# Altium PCB MICROCONTROLLER.PcbDoc
Units mm, origin at the board's own origin, x right, y up, seen from the top; angles counter-clockwise.
Board outline 58 x 58 mm, 2 copper layers (Top Layer, Bottom Layer); 5 components, 27 nets, 52 pads, 0 vias.
Unrouted connection lines stored in the file: 1.
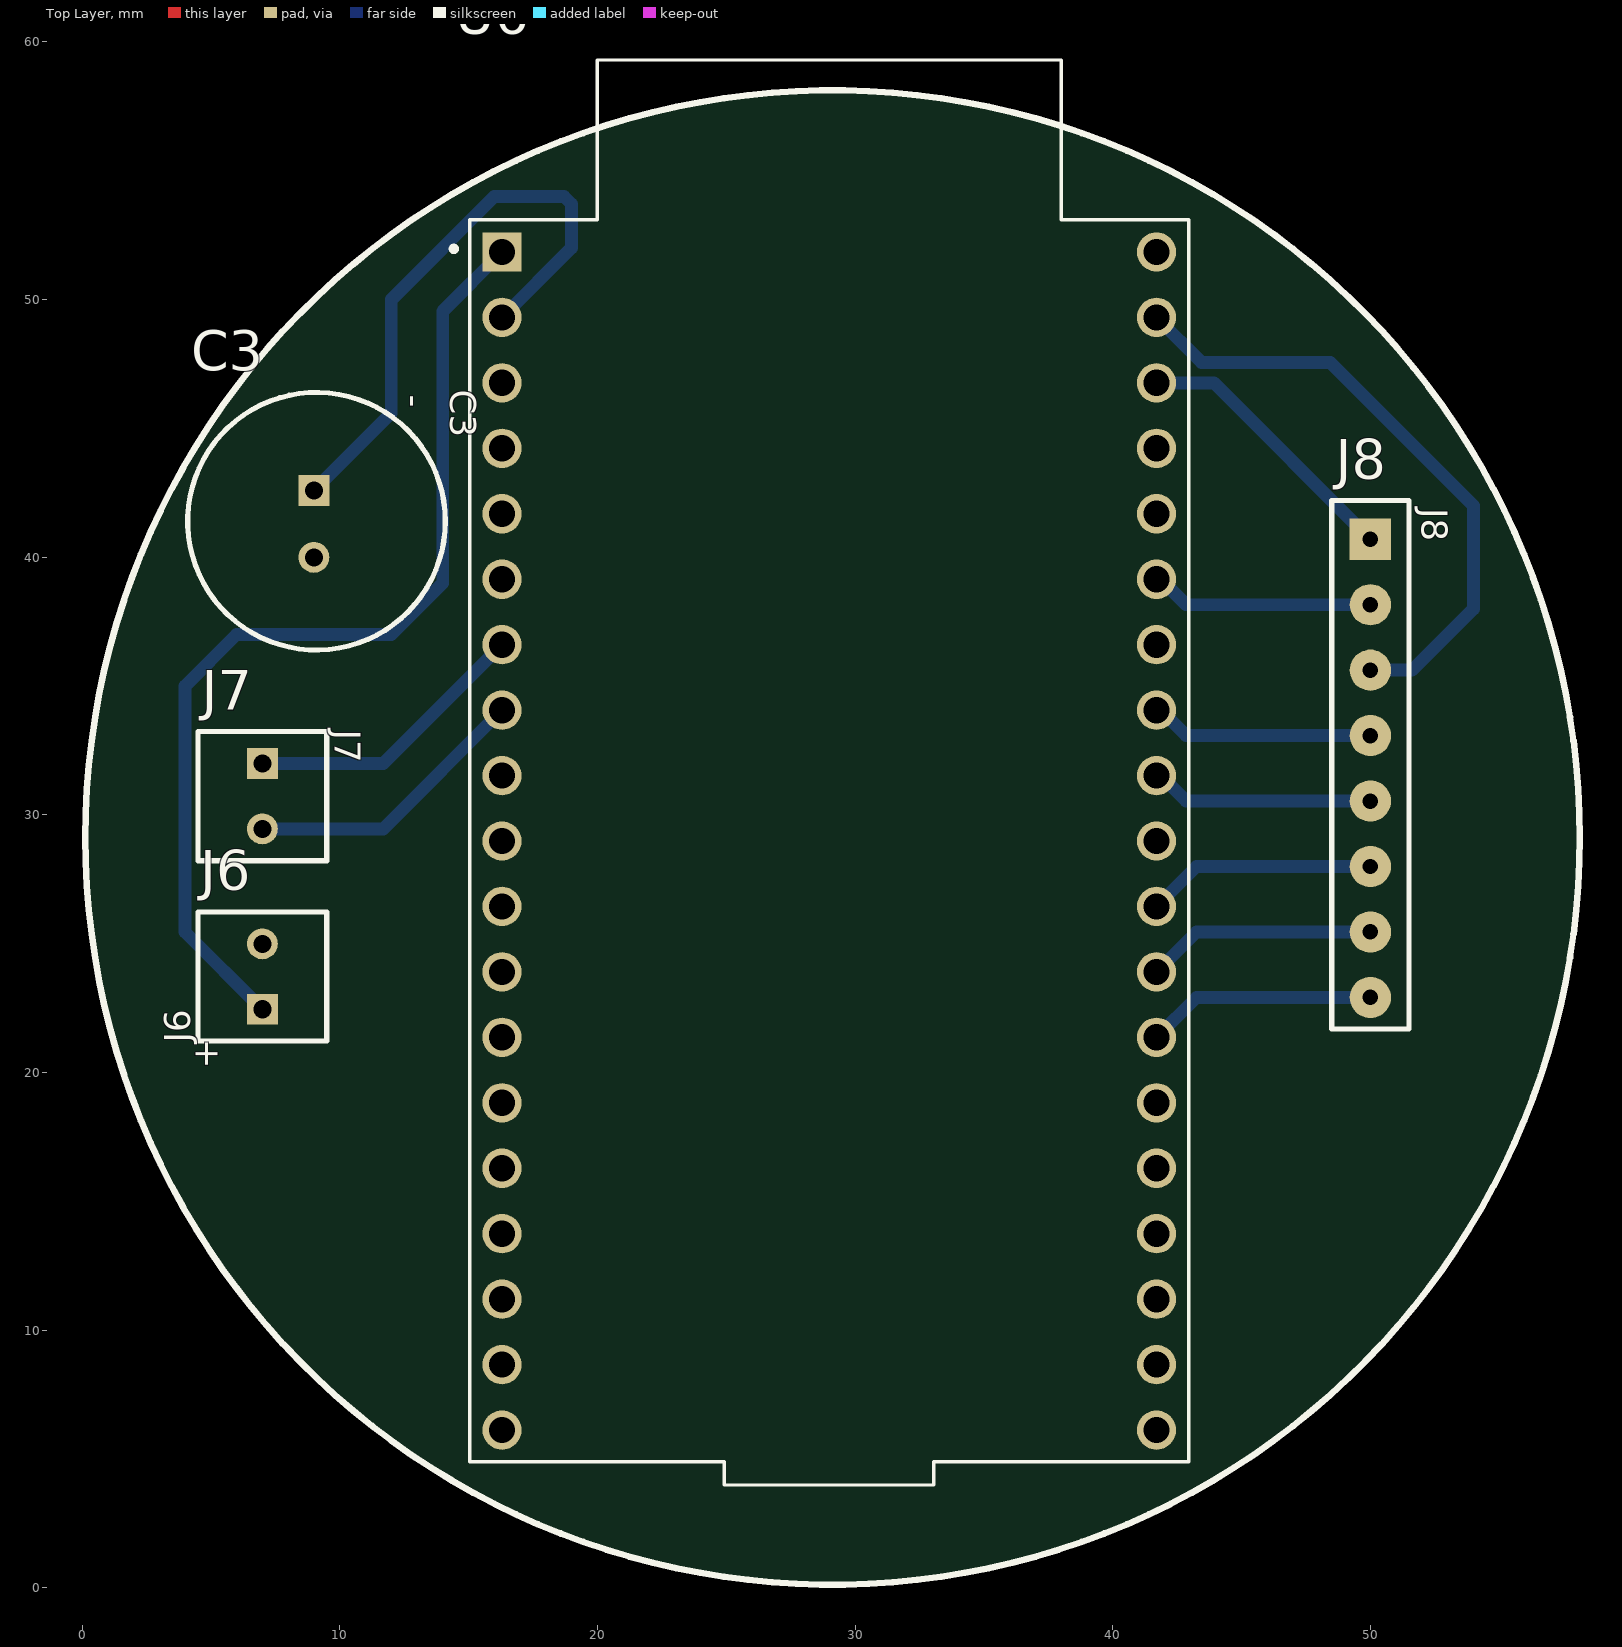
[diagram p0: Top Layer view]
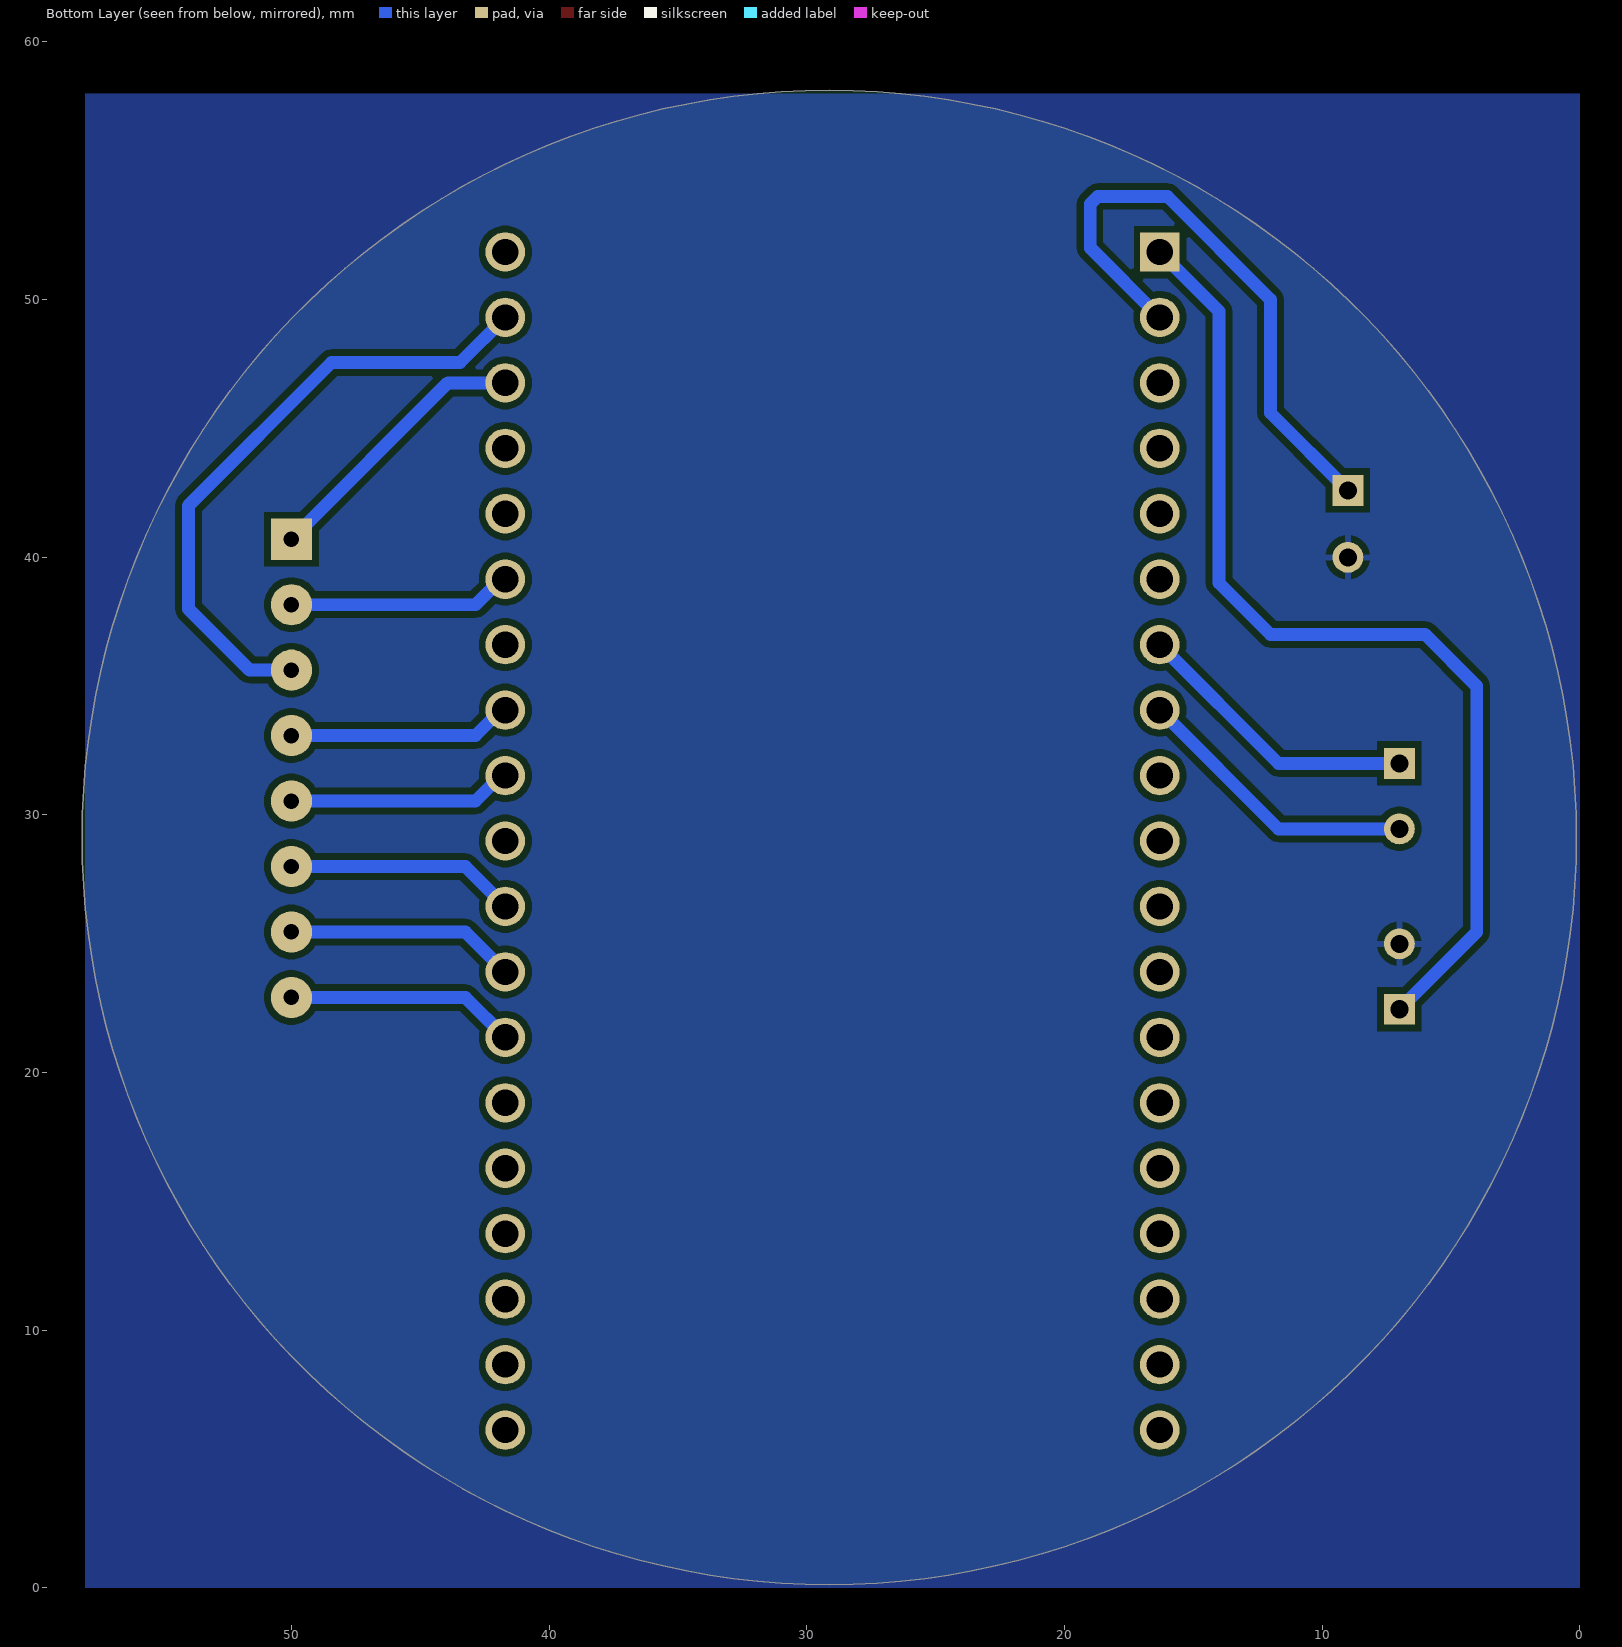
[diagram p1: Bottom Layer view, seen from below]
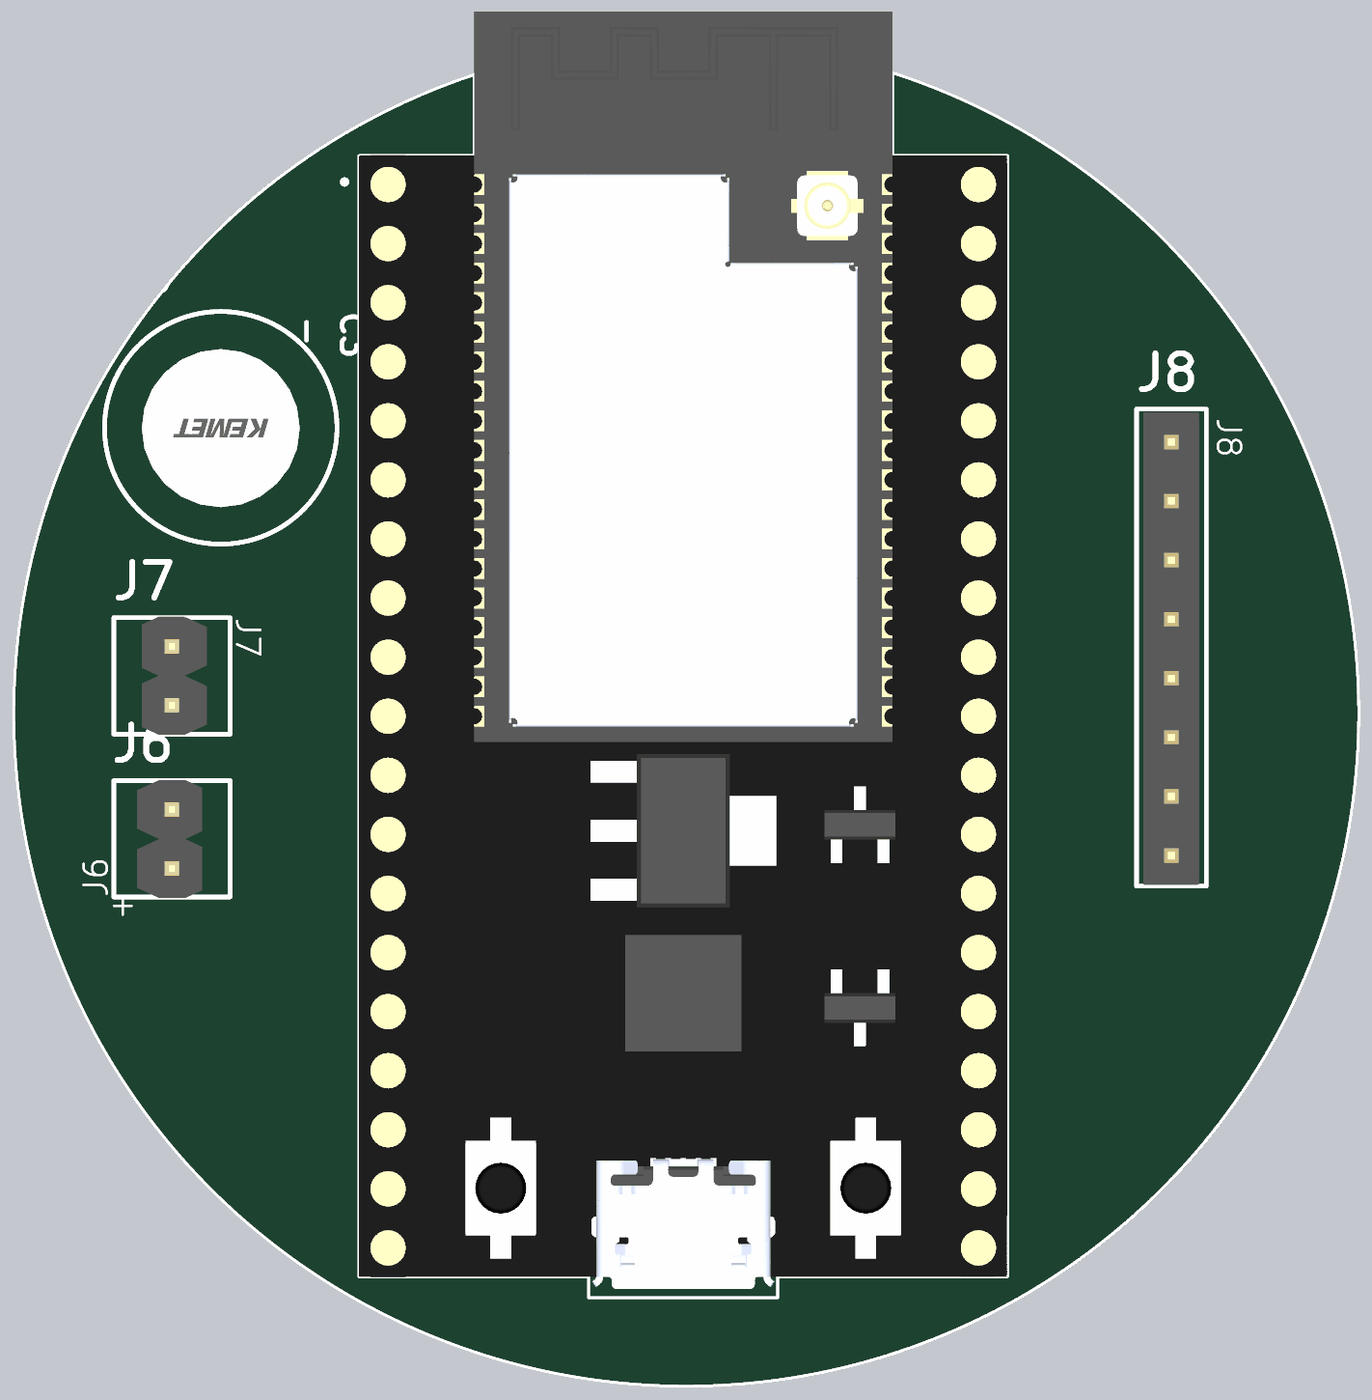
[diagram p2: 3D render of the assembled board from above, using the file's embedded part models]

## Layer stack, top to bottom
Top Solder: solder mask 0.0102, Solder Resist, Dk 3.5
Top Layer: signal copper 0.0356
Dielectric 1: dielectric 0.32, FR-4, Dk 4.8
Bottom Layer: signal copper 0.0356
Bottom Solder: solder mask 0.0102, Solder Resist, Dk 3.5

## Board outline
29.127,0.127 cw(c29.127,29.127) 0.127,29.127 cw(c29.127,29.127) 29.127,58.127 cw(c29.127,29.127) 58.127,29.127 cw(c29.127,29.127)

## Design rules (kind name [scope] priority, off if disabled: settings)
Clearance [All] p1: gap=0.254 ignorepadtopadclearanceinfootprint=FALSE except(0: Arc-Hole Track-Hole SMDPad-Hole THPad-Hole Via-Hole Fill-Hole Poly-Hole Region-Hole Text-Hole)
PolygonConnect [All] p1: connectstyle=Relief reliefconductorwidth=0.254 reliefentries=4 polygonreliefangle="90 Angle" airgapwidth=0.254
RoutingVias [All] p1: holewidth=0.711 width=1.27 viastyle="Through Hole" minholewidth=0.711 minwidth=1.27 maxholewidth=0.711 maxwidth=1.27
SolderMaskExpansion [All] p1: expansion=0.102 istentingtop=FALSE
Width [All] p1: maxlimit=0.5 minlimit=0.5 preferedwidth=0.5
30 further rules are at their usual default settings.

## Components (designator, comment, footprint, x,y, rotation, side; value= is the part's Value field where it differs from the comment)
C3 "10uF" "Electrolytic capacitor 2mm" 9,42.6 r270 top
J6 "PWR_CONNECTOR" BATT 7,22.46 r90 top
J7 "2x1_CONN" CONN2x1_2.54mm 7,32 r270 top
J8 "8x1 CONN" CONN8x1_2.54 50,40.7 r0 top
U6 "ESP32-DEVKITC-32U" MODULE_ESP32-DEVKITC-32U 29,29 r0 top

## Footprints (in the part's own frame and the unit in brackets; to place one, negate y for a bottom-side part, rotate by r counter-clockwise, add the part's x,y. Pads: shape width x height; smd on the part's side, far side on the other; paste and mask are expansions set on the pad)
BATT [mm]
  rect 1.2x1.2 hole 0.7: 1(0,0)
  round 1.2 hole 0.7: 2(2.54,0)
  silkscreen extent -1.23,-2.5 3.77,2.5, body extent -1.28,-1.3 3.8,1.5, height 8.06
CONN2x1_2.54mm [mm]
  rect 1.2x1.2 hole 0.7: 1(0,0)
  round 1.2 hole 0.7: 2(2.54,0)
  silkscreen extent -1.23,-2.5 3.77,2.5, body extent -1.28,-1.3 3.8,1.5, height 8.06
CONN8x1_2.54 [mm]
  rect 1.6x1.6 hole 0.6: 1(0,0)
  round 1.6 hole 0.6: 2(0,-2.54) 3(0,-5.08) 4(0,-7.62) 5(0,-10.16) 6(0,-12.7) 7(0,-15.24) 8(0,-17.78)
  silkscreen extent -1.5,-19 1.5,1.5, body extent -1.2,-18.96 1.2,1.36, height 8.2
"Electrolytic capacitor 2mm" [mm]
  rect 1.2x1.2 hole 0.7: 1(0,0)
  round 1.2 hole 0.7: 2(2.6,0)
  silkscreen extent -3.8,-4.9 6.2,5.1, body extent -2.17,-3.3 4.6,3.5, height 12.52
MODULE_ESP32-DEVKITC-32U [mm]
  rect 1.53x1.53 / inner round 1.53 / far side rect 1.53x1.53 hole 1.02 mask+0.05: 1(-12.7,22.85)
  round 1.53 hole 1.02 mask+0.05: 2(-12.7,20.31) 3(-12.7,17.77) 4(-12.7,15.23) 5(-12.7,12.69) 6(-12.7,10.15) 7(-12.7,7.61) 8(-12.7,5.07) 9(-12.7,2.53) 10(-12.7,-0.01) 11(-12.7,-2.55) 12(-12.7,-5.09) 13(-12.7,-7.63) 14(-12.7,-10.17) 15(-12.7,-12.71) 16(-12.7,-15.25) 17(-12.7,-17.79) 18(-12.7,-20.33) 19(-12.7,-22.87) 20(12.7,-22.87) 21(12.7,-20.33) 22(12.7,-17.79) 23(12.7,-15.25) 24(12.7,-12.71) 25(12.7,-10.17) 26(12.7,-7.63) 27(12.7,-5.09) 28(12.7,-2.55) 29(12.7,-0.01) 30(12.7,2.53) 31(12.7,5.07) 32(12.7,7.61) 33(12.7,10.15) 34(12.7,12.69) 35(12.7,15.23) 36(12.7,17.77) 37(12.7,20.31) 38(12.7,22.85)
  silkscreen extent -14.67,-25 13.95,30.3, body extent -13.95,-24.62 13.95,30.3, height 7.95

## Part data
C3: library part E_CAP_10uF, "Throug-hole 10uF"
J6: library part PWR-CONN, "THT Connector"
J7: library part "CONN 2x1", "THT 2x1 2.54mm CONN"
J8: library part "CONN 8x1", "THT 8x1 2.54mm CONN"
U6: "ESP32-WROOM-32UE series Transceiver; 802.11 b/g/n (Wi-Fi, WiFi, WLAN), BluetoothÂ® Smart Ready 4.x Dual Mode Evaluation Board", Package=None, Availability="In Stock", Check_prices=https://www.snapeda.com/parts/ESP32-DEVKITC-32U/Espressif+Systems/view-part/?ref=eda, MF="Espressif Systems", MP=ESP32-DEVKITC-32U, Price=None, Purchase-URL=https://pricing.snapeda.com/search/part/ESP32-DEVKITC-32U/?ref=eda, SnapEDA_Link=https://www.snapeda.com/parts/ESP32-DEVKITC-32U/Espressif+Systems/view-part/?ref=snap

## Nets (pads, with @x,y where several pads share a name; then routed paths per layer and width w, separated by ;. In a path a pad name is that pad's centre, name@x,y a point inside that pad or via, vN(x,y) a via of type N, cw(c..) or ccw(c..) an arc to the next point about the centre after c; other vN are vias at no path point)
3V3: 
3V3a: 
3V3b: J6.1 U6.1 | length 39.2
  Bottom Layer w0.5: J6.1 4,25.46 4,35 6,37 12,37 14,39 14,49.55 U6.1
32: 
DHT11: J7.2 U6.8 | length 11.2
  Bottom Layer w0.5: J7.2 11.69,29.46 U6.8
GND: 
GNDa: 
GNDb: C3.2 J6.2
LED: J7.1 U6.7 | length 11.2
  Bottom Layer w0.5: J7.1 11.69,32 U6.7
LoRacs: J8.6 U6.28 | length 8.9
  Bottom Layer w0.5: U6.28 43.25,28 J8.6
LoRaDIO0: J8.8 U6.26 | length 8.9
  Bottom Layer w0.5: U6.26 43.25,22.92 J8.8
LoRarst: J8.7 U6.27 | length 8.9
  Bottom Layer w0.5: U6.27 43.25,25.46 J8.7
MISO: J8.4 U6.31 | length 8.7
  Bottom Layer w0.5: U6.31 41.863,34.07 42.853,33.08 J8.4
MOSI: J8.3 U6.37 | length 24.3
  Bottom Layer w0.5: U6.37 43.454,47.556 48.444,47.556 54,42 54,38 51.62,35.62 J8.3
NetB1_2: 
NetC1_2: 
NetC2_2: 
NetC3_1: C3.1 U6.2 | length 22.9
  Bottom Layer w0.5: C3.1 12,45.6 12,50 16,54 18.707,54 19,53.707 19,52.01 U6.2
NetD1_1: 
NetD2_2: 
NetR1_2: 
NetR4_2: 
SCK: J8.5 U6.30 | length 8.7
  Bottom Layer w0.5: U6.30 41.863,31.53 42.853,30.54 J8.5
SCL: 
SCLa: J8.1 U6.36 | length 10.8
  Bottom Layer w0.5: U6.36 43.93,46.77 J8.1
SDA: 
SDAa: J8.2 U6.33 | length 8.7
  Bottom Layer w0.5: U6.33 41.863,39.15 42.853,38.16 J8.2
pads on no net: U6.3 U6.4 U6.5 U6.6 U6.9 U6.10 U6.11 U6.12 U6.13 U6.14 U6.15 U6.16 U6.17 U6.18 U6.19 U6.20 U6.21 U6.22 U6.23 U6.24 U6.25 U6.29 U6.32 U6.34 U6.35 U6.38

## Polygon pours and split planes (outlines as drawn)
GNDb on Bottom Layer "GNDB_L02_P000" (solid, pour order 0): 0,58 58,58 58,0 0,0

## Silkscreen, mask and mechanical layers (free items; w line width, h text height)
Top Overlay:
  circle w0.254: c29.127,29.127 r29

## Text inside footprints (layer, text, board x,y; h text height)
C3: Top Overlay "-" at 12.4,46.3 h1 r270
J6: Top Overlay "+" at 5.267,20.16 h1 r90